# EAGLE board hamownia_output (EAGLE 9.2.0)
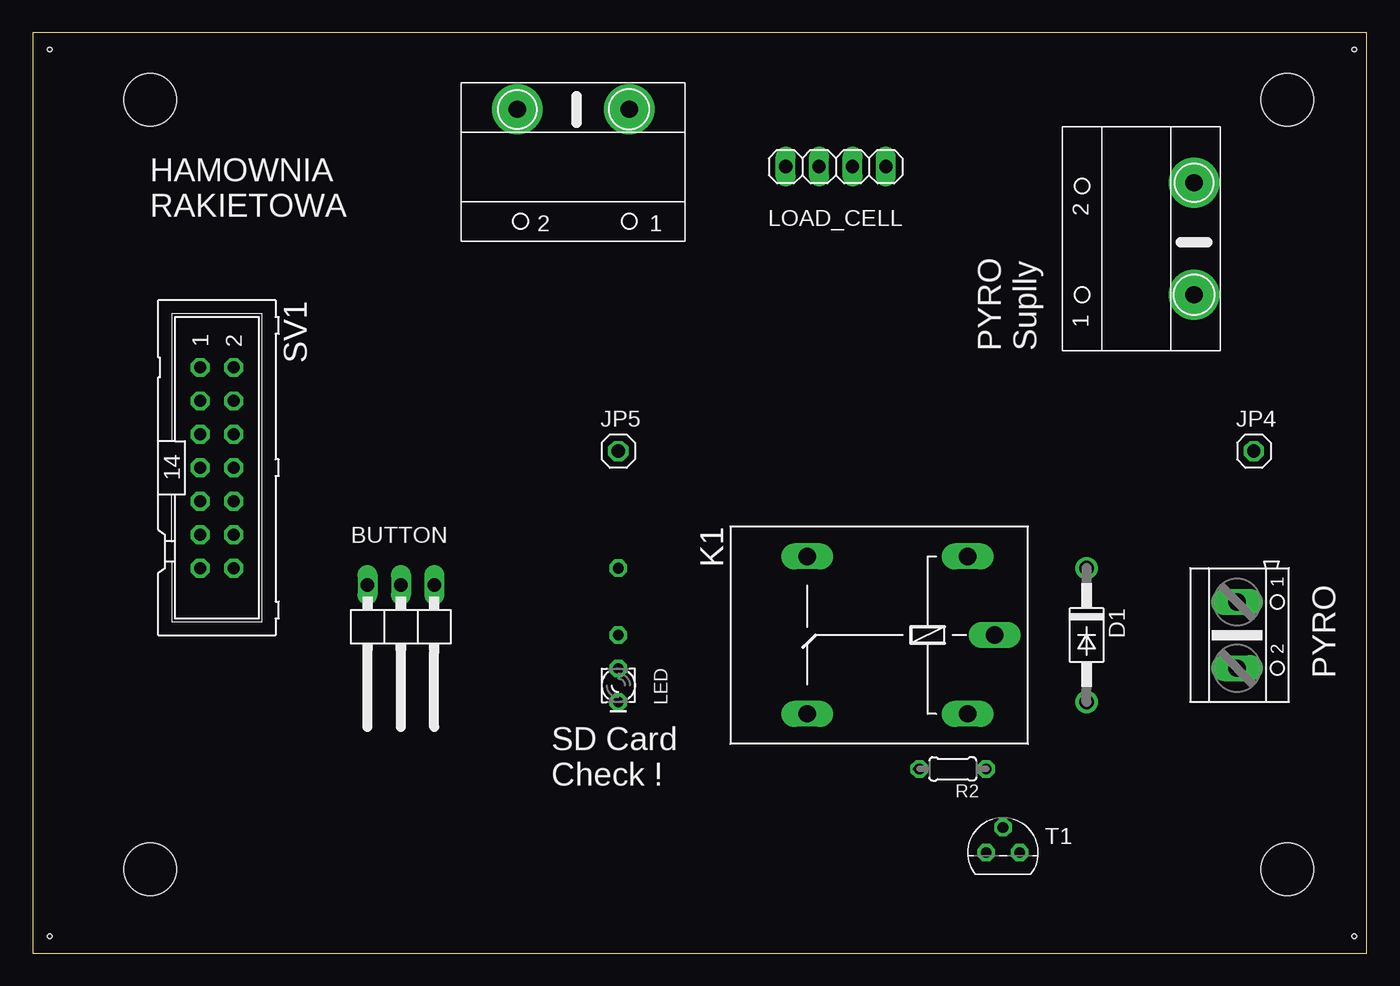
[diagram p0: board, top side]
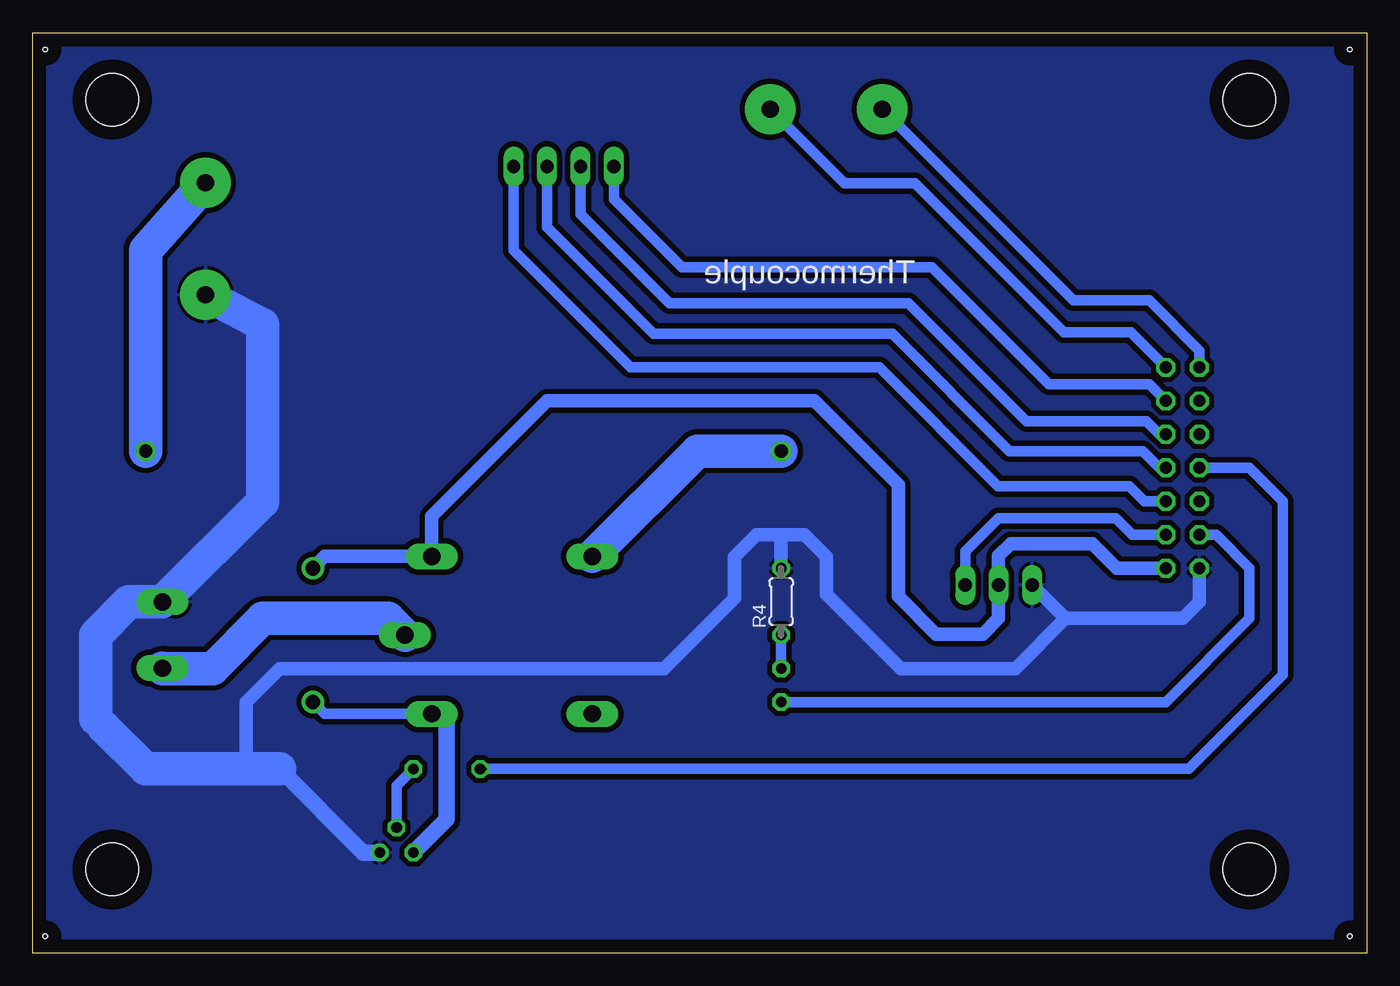
[diagram p1: board, bottom side, seen from below]

Size 101.27 x 69.84 mm. Coordinates in mm from the lower left corner, seen from the top.
Outline: 0,0 101.27,0 101.27,69.84 0,69.84 0,0
Copper layers (1*16): Top 0.035mm / dielectric 1.5mm / Bottom 0.035mm
Design rules "default": minimum track width 6mil, minimum drill 0.35mm, track to track 6mil, track to pad 6mil, pad to pad 6mil, via to via 6mil, smd to smd 6mil, copper to edge 40mil, drill to drill 6mil, minimum pad ring 10mil, minimum via ring 8mil, stop-mask expansion 4mil, vias tented up to drill 0mil, thermal gap 10mil
Holes 4 mm at 95.25,64.77 8.89,6.35 95.25,6.35 8.89,64.77
Holes 0.35 mm at 1.27,68.58 1.27,1.27 100.33,1.27 100.33,68.58

## Footprints (pad centres in the part's own frame; a part is rotated, then mirrored left to right if it is on the bottom)
1X03/90 = drill 1.016 long: 1 -2.54,-3.81; 2 0,-3.81; 3 2.54,-3.81
DO41-10 = drill 1.118: A 5.08,0; C -5.08,0
1X01 = drill 1.016 octagon: 1 0,0
G5LE = drill 1.321 long: 1 -7.493,-5.969; 2 -7.493,5.969; O 4.699,5.969; P -9.525,0; S 4.699,-5.969
LED_LD260 = drill 0.813 octagon: A -1.27,0; K 1.27,0
1X04 = drill 1.016 long: 1 -3.81,0; 2 -1.27,0; 3 1.27,0; 4 3.81,0
ZLACZESRUBOWE8.5MM = drill 1.3 pad 3.81: P$1 4.25,2; P$2 12.75,2
AK500/2 = drill 1.321 long: 1 -2.515,0; 2 2.515,0
0204/5 = drill 0.813 octagon: 1 -2.54,0; 2 2.54,0
ML14 = drill 0.914 octagon: 1 -7.62,-1.27; 2 -7.62,1.27; 3 -5.08,-1.27; 4 -5.08,1.27; 5 -2.54,-1.27; 6 -2.54,1.27; 7 0,-1.27; 8 0,1.27; 9 2.54,-1.27; 10 2.54,1.27; 11 5.08,-1.27; 12 5.08,1.27; 13 7.62,-1.27; 14 7.62,1.27
TO92 = drill 0.813 octagon: 1 1.27,0; 2 0,1.905; 3 -1.27,0

## Placement (x,y rotation side)
BUTTON  [1X03/90]  27.94,24.13 180 top
D1  [DO41-10]  80.01,24.13 270 top
JP4  [1X01]  92.71,38.1 0 top
JP5  [1X01]  44.45,38.1 0 top
K1  [G5LE]  63.5,24.13 180 top
LED  [LED_LD260]  44.45,20.32 270 top
LOAD_CELL  [1X04]  60.96,59.69 0 top
POWER_SUPPLY  ARK_8.5MM  [ZLACZESRUBOWE8.5MM]  90.17,45.72 90 top
PYRO  [AK500/2]  91.44,24.13 270 top
R2  10k  [0204/5]  69.85,13.97 180 top
R4  1k  [0204/5]  44.45,26.67 90 bottom
SV1  [ML14]  13.97,36.83 270 top
T1  BC547  [TO92]  73.66,7.62 0 top
U$1  ARK_8.5MM  [ZLACZESRUBOWE8.5MM]  49.53,66.04 180 top

## Library data of the parts
BUTTON JP4 JP5 LOAD_CELL = pinhead
D1 = diode
K1 = relay; OC_FARNELL: unknown; OC_NEWARK: unknown
LED = eagle-ltspice; SPICEMODEL: NONE; SPICEPREFIX: D; SPICETYPE: diode
POWER_SUPPLY U$1 = 111_ark_8.5mm
PYRO = con-ptr500; OC_FARNELL: unknown; OC_NEWARK: unknown
R2 R4 = rcl; SPICEPREFIX: R
SV1 = con-harting-ml; OC_FARNELL: unknown; OC_NEWARK: unknown
T1 = transistor

## Nets
+: SV1.2 U$1.P$1
+5V/2: BUTTON.2 D1.C K1.1 SV1.14
-: SV1.1 U$1.P$2
A0: LED.K SV1.11
A1: BUTTON.1 SV1.12
A2: R2.2 SV1.7
A+: LOAD_CELL.4 SV1.10
A-: LOAD_CELL.3 SV1.8
E+: LOAD_CELL.1 SV1.4
E-: LOAD_CELL.2 SV1.6
GND: BUTTON.3 POWER_SUPPLY.P$1 PYRO.1 R4.2 SV1.13 T1.1
N$1: D1.A K1.2 T1.3
N$2: R2.1 T1.2
N$3: K1.P PYRO.2
N$6: LED.A R4.1
N$7: JP5.1 K1.S
VCC: JP4.1 POWER_SUPPLY.P$2

## Tracks (layer width: path | path; a pad name or v marks a point on that pad's centre or on a via)
+
  Bottom 0.813: SV1.2 17.89,47.1 22.98,47.1 34.29,58.42 39.66,58.42 U$1.P$1
+5V/2
  Bottom 1.016: D1.C 79.12,30.1 K1.1 70.99,33.15 62.23,41.91 41.91,41.91 35.56,35.56 35.56,27.08 32.69,24.21 29.13,24.21 27.94,25.4 BUTTON.2 | BUTTON.2 27.94,29.21 | SV1.14 18.95,29.21 20.82,31.08 27,31.08 27.94,30.14 BUTTON.2
-
  Bottom 0.813: U$1.P$2 22.27,49.53 16.51,49.53 12.7,45.72 SV1.1
A0
  Bottom 0.305: 8.89,29.21 8.89,29.08 | 11.43,31.75 11.38,31.7
  Bottom 0.813: SV1.11 11.43,31.75 | 11.38,31.7 8.89,29.21 | 8.89,29.08 8.89,25.4 15.24,19.05 LED.K
A1
  Bottom 0.813: SV1.12 17.78,31.75 19.05,33.02 27.94,33.02 30.48,30.48 BUTTON.1
A2  (via drill 0.35)
  Top 0.305: v67,13.97 R2.2
  Bottom 0.305: 9,36.83 8.89,36.83
  Bottom 0.813: SV1.7 9,36.83 | v67,13.97 13.51,13.97 6.35,21.13 6.35,34.29 8.89,36.83
A+
  Bottom 0.813: LOAD_CELL.4 64.77,53.34 55.88,44.45 37,44.45 27.98,35.43 18,35.43 16.86,34.29 SV1.10
A-
  Bottom 0.305: 62.23,59.08 LOAD_CELL.3
  Bottom 0.813: SV1.8 15.73,36.83 17,38.1 27.11,38.1 36,46.99 54.14,46.99 62.23,55.08 62.23,59.08
E+
  Bottom 0.813: SV1.4 16.51,43.18 24.13,43.18 33.02,52.07 52,52.07 57.15,57.22 LOAD_CELL.1
E-
  Bottom 0.813: SV1.6 15.73,39.37 16.72,40.36 25.83,40.36 34.77,49.3 52.91,49.3 59.69,56.08 LOAD_CELL.2
GND
  Bottom 0.305: POWER_SUPPLY.P$1 87.38,49.97
  Bottom 0.508: 85.09,13.97 85.09,15.08
  Bottom 0.813: 26.67,21.59 27,21.59
  Bottom 1.016: SV1.13 12.7,26.67 13.97,25.4 22.86,25.4 | BUTTON.3 22.86,25.4 | 22.86,25.4 26.67,21.59 | 27,21.59 35.35,21.59 41,27.24 41,30.08 42.67,31.75 44.45,31.75 | R4.2 44.45,31.75 | 44.45,31.75 46.33,31.75 48,30.08 48,26.93 53.34,21.59 82.55,21.59 85.09,19.05 85.09,15.08
  Bottom 1.27: 96.52,17.78 95.89,17.14 | T1.1 76.2,7.62 82.55,13.97
  Bottom 2.54: POWER_SUPPLY.P$1 83.82,47.7 83.82,34.27 PYRO.1 94,26.65 96.52,24.13 96.52,17.78 | 95.89,17.14 92.71,13.97 85.09,13.97 82.55,13.97
  pour Bottom (isolate 0.406): 101,70.08 0,70.08 0,0.08 101,0.08
N$1
  Bottom 0.305: 70.99,18.03 71.12,18.16
  Bottom 0.813: K1.2 79.12,18.16 D1.A
  Bottom 1.27: T1.3 69.85,10.16 69.85,17.78 70.04,17.97 70.93,17.97 70.99,18.03 K1.2
N$2
  Bottom 0.305: 72.64,13.72 R2.1
  Bottom 0.813: 72.64,13.72 73.66,12.7 T1.2
N$3
  Bottom 2.54: K1.P 74.3,25.4 83.82,25.4 87.63,21.59 91.42,21.59 PYRO.2
N$6
  Bottom 0.305: 44.45,24.08 R4.1
  Bottom 0.813: LED.A 44.45,24.08
N$7
  Bottom 2.54: JP5.1 50.8,38.1 K1.S
VCC
  Bottom 2.54: JP4.1 92.71,53.36 POWER_SUPPLY.P$2

## Text on the board
tPlace: HAMOWNIA / RAKIETOWA | PYRO / Suplly | SD Card / Check !
bPlace: Thermocouple